# Altium PCB Sensor.PcbDoc
Units mm, origin at the board's own origin, x right, y up, seen from the top; angles counter-clockwise.
Board outline 55 x 55 mm, 2 copper layers (Top Layer, Bottom Layer); 53 components, 39 nets, 225 pads, 48 vias.
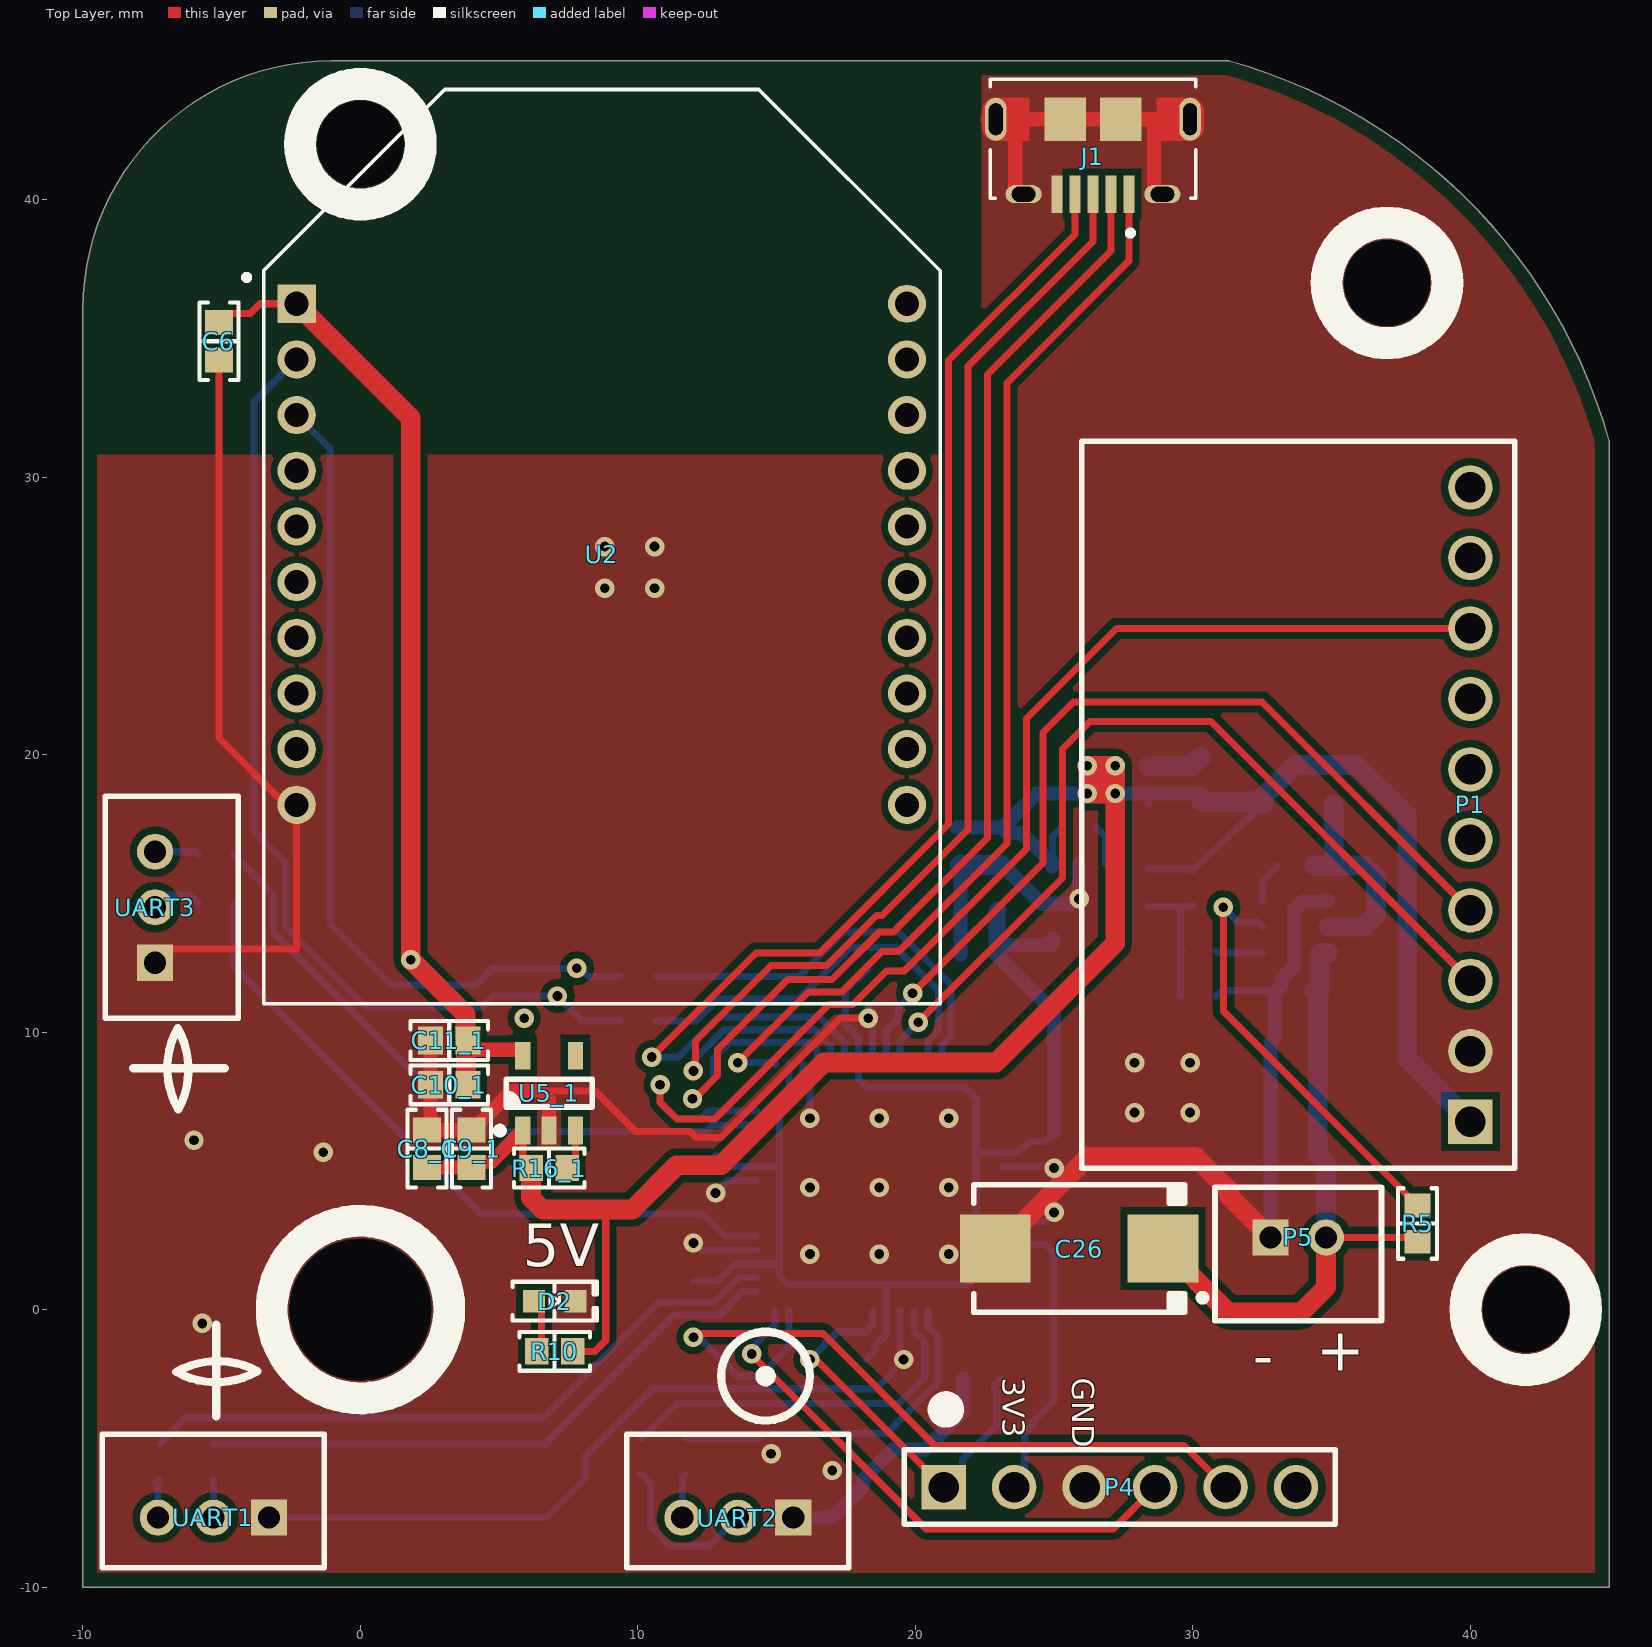
[diagram p0: Top Layer view]
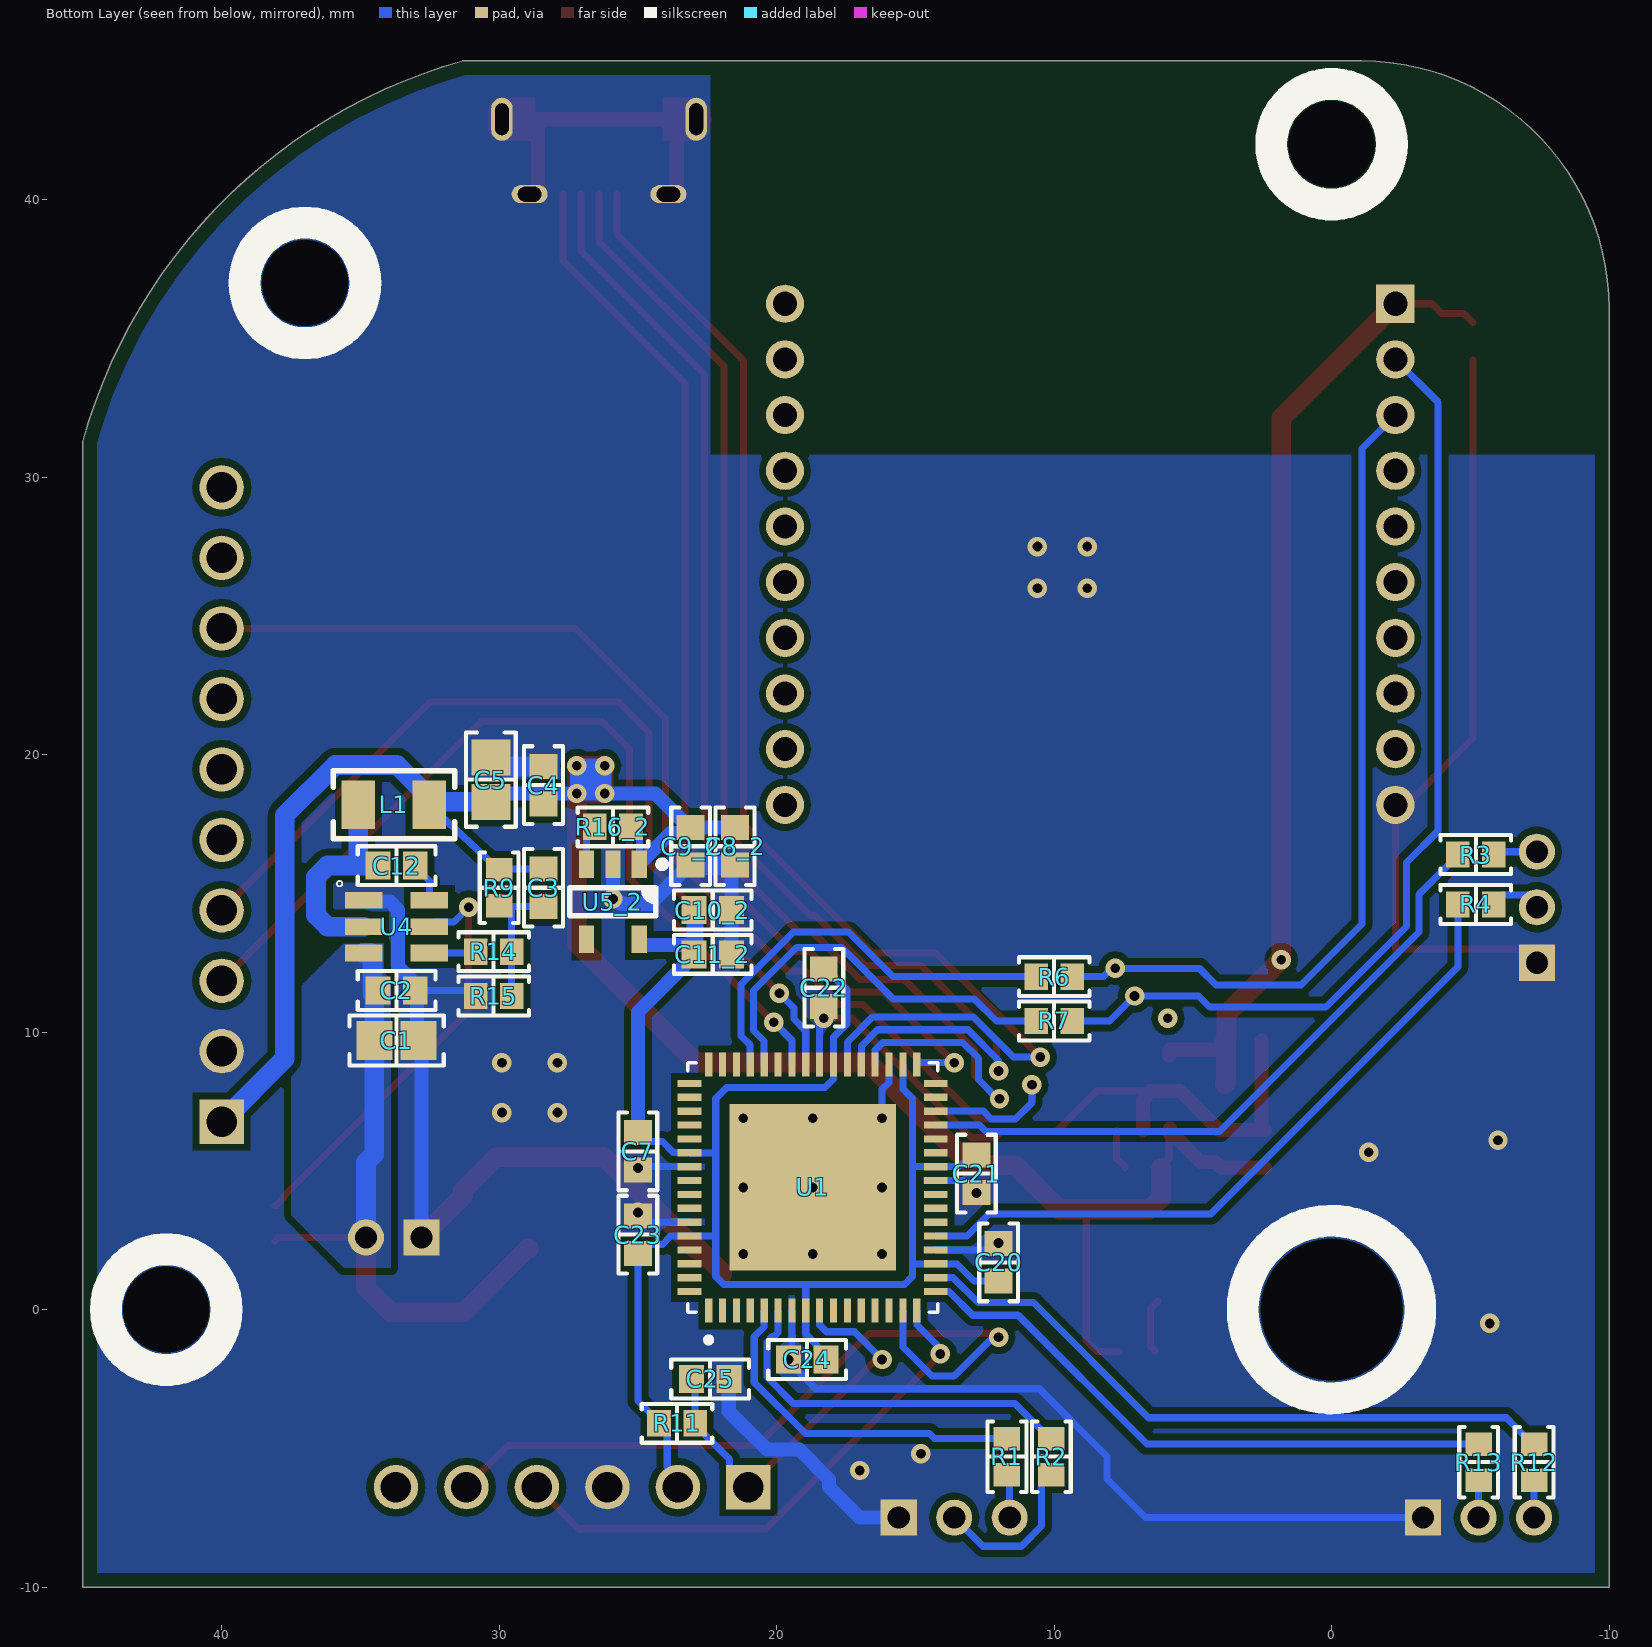
[diagram p1: Bottom Layer view, seen from below]
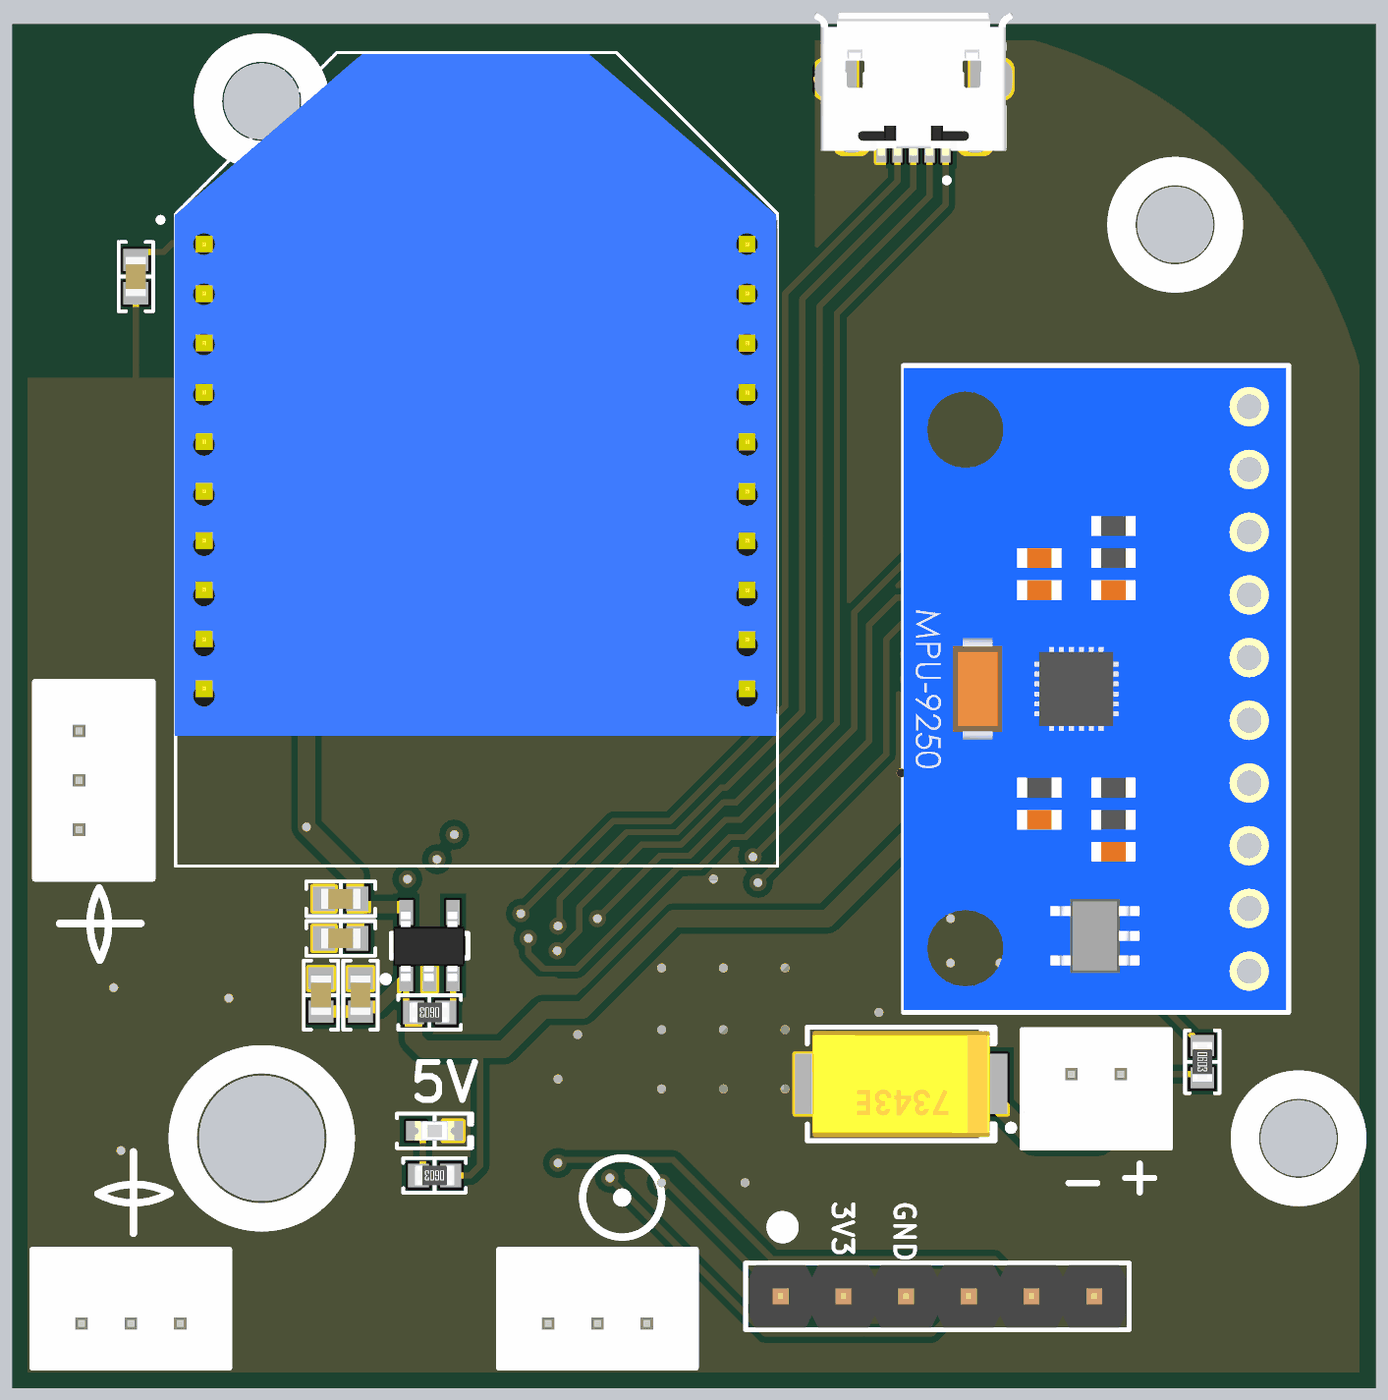
[diagram p2: 3D render of the assembled board from above, using the file's embedded part models]
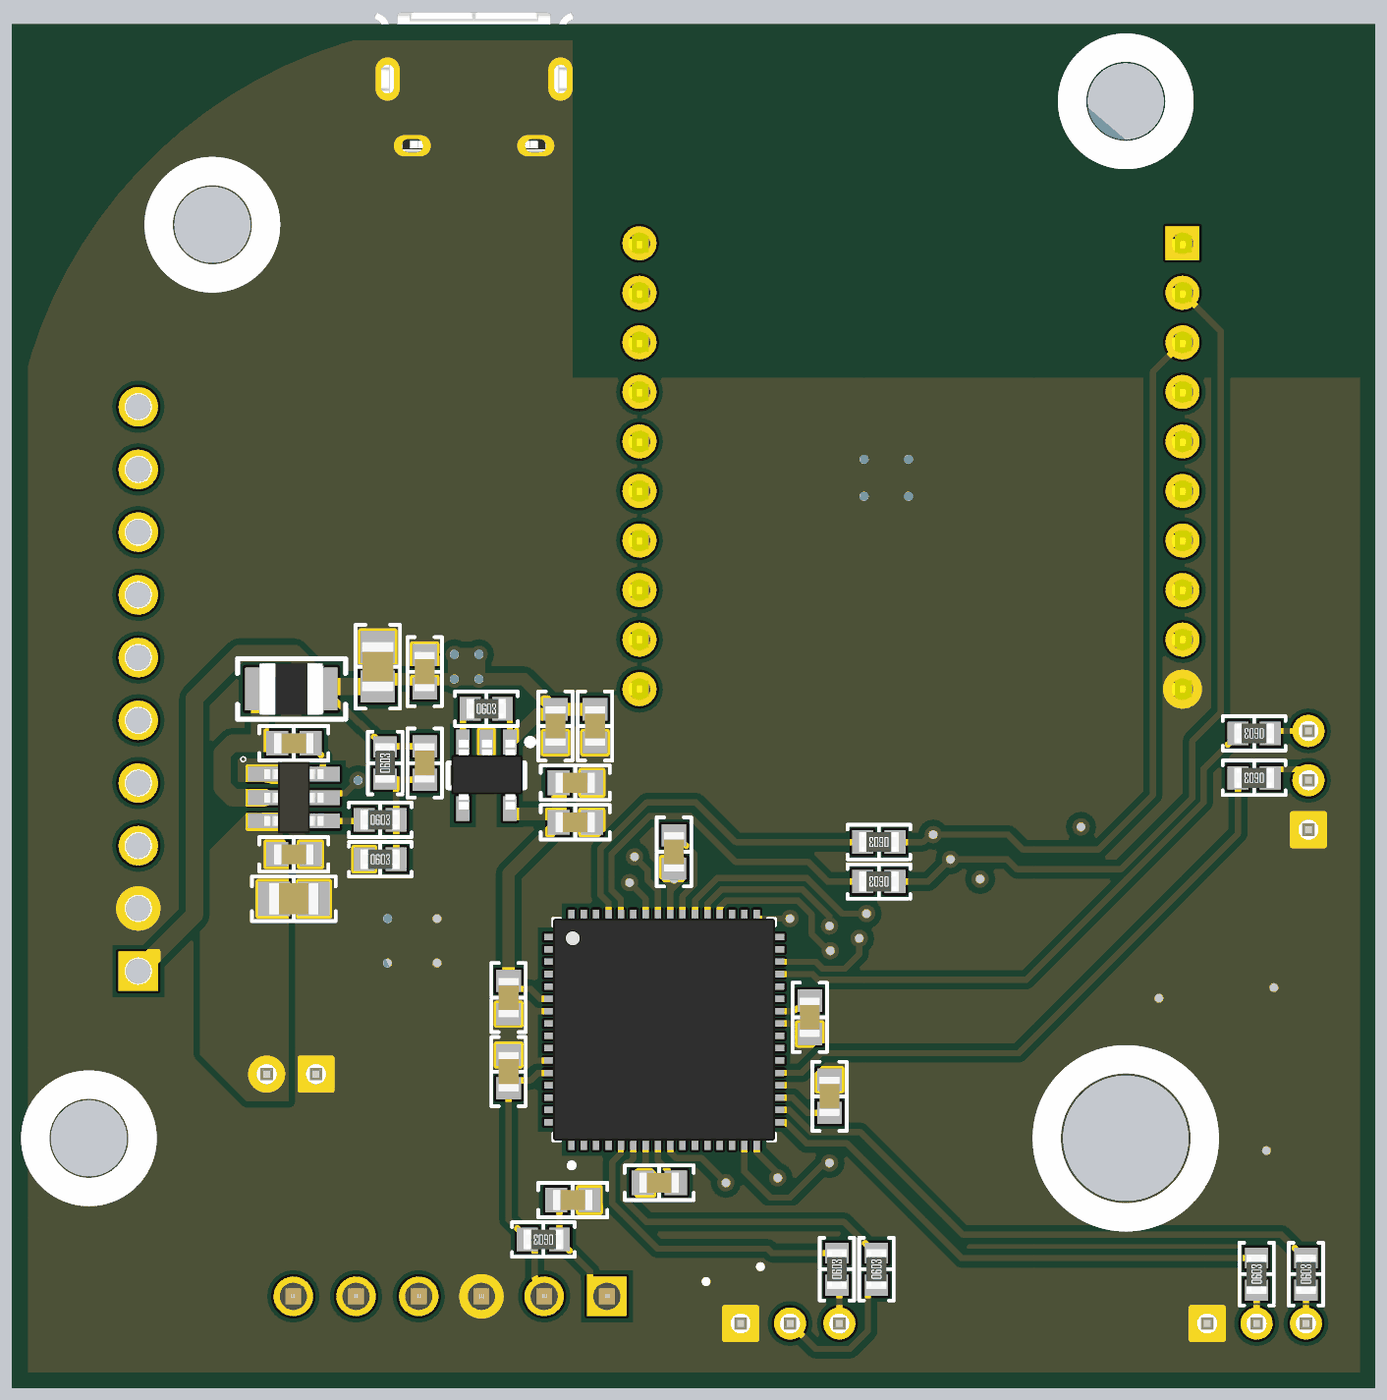
[diagram p3: 3D render of the assembled board from below, using the file's embedded part models]

## Layer stack, top to bottom
Top Solder: solder mask 0.0102, Solder Resist, Dk 3.5
Top Layer: signal copper 0.0356
Dielectric 1: dielectric 0.32, FR-4, Dk 4.8
Bottom Layer: signal copper 0.0356
Bottom Solder: solder mask 0.0102, Solder Resist, Dk 3.5

## Board outline
-10,-10 -10,36.067 cw(c-1.067,36.067) -1.067,45 31.311,45 cw(c26,26) 45,31.311 45,-10

## Design rules (kind name [scope] priority, off if disabled: settings)
BoardOutlineClearance [All] p1: gap=0.512 ignorepadtopadclearanceinfootprint=FALSE
Clearance "PolyGon Pour Clearance" [InPolygon] p1: gap=0.254 ignorepadtopadclearanceinfootprint=FALSE except(0: Arc-Hole Track-Hole SMDPad-Hole THPad-Hole Via-Hole Fill-Hole Poly-Hole Region-Hole Text-Hole; 0.512: Arc-Text Track-Text SMDPad-Text THPad-Text Via-Text Fill-Text Poly-Text Region-Text Text-Text)
Clearance [All] p2: gap=0.254 ignorepadtopadclearanceinfootprint=TRUE except(0: Arc-Hole Track-Hole SMDPad-Hole THPad-Hole Via-Hole Fill-Hole Poly-Hole Region-Hole Text-Hole; 0.2: Arc-Arc Arc-Track Arc-SMDPad Track-Track Track-SMDPad SMDPad-SMDPad)
PolygonConnect [All] p1: connectstyle=Direct reliefconductorwidth=0.254 reliefentries=4 polygonreliefangle="90 Angle" airgapwidth=0.254
RoutingVias [All] p1: holewidth=0.35 width=0.7 viastyle="Through Hole" minholewidth=0.35 minwidth=0.7 maxholewidth=0.711 maxwidth=1.27
SolderMaskExpansion [All] p1: expansion=0.102 istentingtop=FALSE
Width [All] p1: maxlimit=0.712 minlimit=0.254 preferedwidth=0.254
30 further rules are at their usual default settings.

## Classes and differential pairs
channel class 3V3_LDO: U_3V3_LDO2

## Components (designator, comment, footprint, x,y, rotation, side; value= is the part's Value field where it differs from the comment)
C1 "22µF" "CAP 0805_2012" 33.7,9.7 r0 bottom
C2 "0.1µF" "CAP 0603_1608" 33.7,11.5 r180 bottom
C3 "47pF" "CAP 0603_1608" 28.4,15.2 r90 bottom
C4 "1µF" "CAP 0603_1608" 28.4,18.9 r270 bottom
C5 "22µF" "CAP 0805_2012" 30.3,19.1 r270 bottom
C6 "1µF" "CAP 0603_1608" -5.1,34.9 r90 top
C7 "0.1µF" "CAP 0603_1608" 25,5.7 r270 bottom
C8_1 "1µF" "CAP 0603_1608" 2.4,5.8 r270 top (schematic designator C8)
C8_2 "1µF" "CAP 0603_1608" 21.5,16.7 r90 bottom (schematic designator C8)
C9_1 "0.1µF" "CAP 0603_1608" 4,5.8 r90 top (schematic designator C9)
C9_2 "0.1µF" "CAP 0603_1608" 23.1,16.7 r270 bottom (schematic designator C9)
C10_1 "0.1µF" "CAP 0603_1608" 3.2,8.1 r180 top (schematic designator C10)
C10_2 "0.1µF" "CAP 0603_1608" 22.3,14.4 r180 bottom (schematic designator C10)
C11_1 "1µF" "CAP 0603_1608" 3.2,9.7 r0 top (schematic designator C11)
C11_2 "1µF" "CAP 0603_1608" 22.3,12.8 r0 bottom (schematic designator C11)
C12 "1µF" "CAP 0603_1608" 33.7,16 r180 bottom
C20 "0.1µF" "CAP 0603_1608" 12,1.7 r90 bottom
C21 "0.1µF" "CAP 0603_1608" 12.8,4.9 r270 bottom
C22 "0.1µF" "CAP 0603_1608" 18.3,11.6 r270 bottom
C23 "0.1µF" "CAP 0603_1608" 25,2.7 r90 bottom
C24 "0.1µF" "CAP 0603_1608" 18.9,-1.8 r0 bottom
C25 "0.1µF" "CAP 0603_1608" 22.4,-2.5 r180 bottom
C26 "100µF" "CAP POL 2917_7343" 25.9,2.2 r180 top
D2 "Green" "LED 0603_1608 GREEN" 7,0.3 r0 top
J1 "Mirco USB port" AMPHENOL_10118194-0001LF 26.4,42.9 r180 top
L1 "4.7µH" "IND 1008_2520" 33.8,18.2 r180 bottom
P1 "MPU9250" "MPU 9150 - 10 pin 0.1\"" 40,18.2 r270 top
P4 "61300611121" 61300611121 27.37,-6.4 r0 top
P5 "2 pin 2mm JST Male" "2pin - 2mm JST male" 33.8,2.6 r0 top
R1 "21.5 Ohms" "RES 0603_1608" 11.7,-5.3 r90 bottom
R2 "21.5 Ohms" "RES 0603_1608" 10.1,-5.3 r90 bottom
R3 "21.5 Ohms" "RES 0603_1608" -5.2,16.4 r0 bottom
R4 "21.5 Ohms" "RES 0603_1608" -5.2,14.6 r0 bottom
R5 "10 kOhms" "RES 0603_1608" 38.1,3.1 r270 top
R6 "21.5 Ohms" "RES 0603_1608" 10,12 r0 bottom
R7 "21.5 Ohms" "RES 0603_1608" 10,10.4 r0 bottom
R9 "40.2 kOhms" "RES 0603_1608" 30,15.2 r90 bottom
R10 "1 kOhms" "RES 0603_1608" 7,-1.504 r180 top
R11 "10 kOhms" "RES 0603_1608" 23.59,-4.1 r0 bottom
R12 "21.5 Ohms" "RES 0603_1608" -7.3,-5.5 r90 bottom
R13 "21.5 Ohms" "RES 0603_1608" -5.3,-5.5 r90 bottom
R14 "75 kOhms" "RES 0603_1608" 30.2,12.9 r180 bottom
R15 "7.68 kOhms" "RES 0603_1608" 30.2,11.3 r180 bottom
R16_1 "10 kOhms" "RES 0603_1608" 6.8,5.1 r180 top (schematic designator R16)
R16_2 "10 kOhms" "RES 0603_1608" 25.9,17.4 r180 bottom (schematic designator R16)
U1 "PIC32MZ0512EFE064" QFN50P900X900X100-65N 18.7,4.4 r90 bottom
U2 "XBee" XBee 8.7,27.5 r0 top
U4 "AP65211A" TSOT-26-6 33.7,13.8 r180 bottom
U5_1 "MIC5504" "TI SOT-23-5 DBV" 6.8,7.8 r90 top (schematic designator U5)
U5_2 "MIC5504" "TI SOT-23-5 DBV" 25.9,14.7 r270 bottom (schematic designator U5)
UART1 "3 pin 2mm JST Male" "3pin - 2mm header" -5.3,-7.5 r180 top
UART2 "3 pin 2mm JST Male" "3pin - 2mm header" 13.6,-7.5 r180 top
UART3 "3 pin 2mm JST Male" "3pin - 2mm header" -7.4,14.5 r90 top

## Footprints (in the part's own frame and the unit in brackets; to place one, negate y for a bottom-side part, rotate by r counter-clockwise, add the part's x,y. Pads: shape width x height; smd on the part's side, far side on the other; paste and mask are expansions set on the pad)
"2pin - 2mm JST male" [mm]
  rect 1.3x1.3 hole 0.8: 1(-1,0)
  round 1.3 hole 0.8: 2(1,0)
  silkscreen extent -3,-3 3,1.8, body extent -2.93,-2.97 2.93,1.7, height 5.89
"3pin - 2mm header" [mm]
  rect 1.3x1.3 hole 0.8: 1(-2,0)
  round 1.3 hole 0.8: 2(0,0) 3(2,0)
  silkscreen extent -4,-3 4,1.8, body extent -3.93,-2.97 3.93,1.7, height 5.89
61300611121 [mm] "Pin Header, pitch 2.54 mm, THT, Vertical, single row, 6p"
  rect 1.6x1.6 hole 1.1: 1(-6.35,0)
  round 1.6 hole 1.1: 2(-3.81,0) 3(-1.27,0) 4(1.27,0) 5(3.81,0) 6(6.35,0)
  silkscreen extent -7.77,-1.35 7.77,1.35, body extent -7.62,-1.27 7.62,1.27, height 8.57
AMPHENOL_10118194-0001LF [mm]
  rect 0.4x1.35 smd: 1(-1.3,2.7) 2(-0.65,2.7) 3(0,2.7) 4(0.65,2.7) 5(1.3,2.7)
  oval 1.3x0.65 hole 0.55 slot 0.85 at 0 deg: S1(-2.5,2.7) S2(2.5,2.7)
  oval 0.775x1.55 hole 0.5 slot 1.15 at 90 deg: S3(-3.5,0) S6(3.5,0)
  rect 1.5x1.55 smd: S4(-1,0) S5(1,0)
  Top Layer region: 193 vertices and 0 holes, not listed, extent 2.3,-0.78 4,0.775
  Top Layer region: 193 vertices and 0 holes, not listed, extent -4,-0.775 -2.3,0.78
  silkscreen extent -3.7,-1.45 3.7,4.2, body extent -4.02,-2.7 4.03,3.1, height 2.7
"CAP 0603_1608" [mm] "Chip Capacitor, 2-Leads, Body 1.60x0.80mm, IPC Medium Density"
  rect 0.9x1 smd: 1(-0.675,0) 2(0.675,0)
  silkscreen extent -1.4,-0.7 1.4,0.7, body extent -0.8,-0.41 0.8,0.41, height 0.82
"CAP 0805_2012" [mm] "Chip Capacitor, 2-Leads, Body 2.00x1.20mm, IPC Medium Density"
  rect 1.3x1.4 smd: 1(-0.8,0) 2(0.8,0)
  silkscreen extent -1.7,-0.9 1.7,0.9, body extent -1,-0.64 1,0.64, height 1.26
"CAP POL 2917_7343" [mm] "Molded Capacitor, 2-Leads, Body 7.30x4.30mm, IPC Medium Density"
  rect 2.55x2.45 smd: 1(-3.025,0) 2(3.025,0)
  silkscreen extent -4.58,-2.3 3.8,2.3, body extent -3.65,-2.15 3.65,2.15, height 4.1
"IND 1008_2520" [mm] "Chip Inductance, 2-leads, Body 2.5x2.1mm, IPC Medium Density"
  rect 1.2x1.75 smd: 1(-1.275,0) 2(1.275,0)
  silkscreen extent -2.18,-1.22 2.2,1.22, body extent -1.3,-1.05 1.3,1.05, height 1
"LED 0603_1608 GREEN" [mm] "Chip Diode, 2-Leads, Body 1.60x0.80mm, IPC Medium Density"
  rect 0.8x0.8 smd: 1(-0.75,0) 2(0.75,0)
  silkscreen extent -1.52,-0.7 1.52,0.7, body extent -0.8,-0.4 0.8,0.4, height 0.53
"MPU 9150 - 10 pin 0.1\"" [mm] "Pin Header, pitch 2.54 mm, THT, Vertical, single row, 10p"
  rect 1.6x1.6 hole 1.1: 1(11.43,0)
  round 1.6 hole 1.1: 2(8.89,0) 3(6.35,0) 4(3.81,0) 5(1.27,0) 6(-1.27,0) 7(-3.81,0) 8(-6.35,0) 9(-8.89,0) 10(-11.43,0)
  silkscreen extent -13.1,-14 13.1,1.6, body extent -13,-14 13,1.5, height 3.4
QFN50P900X900X100-65N [mm]
  rect 0.86x0.26 smd: 1(-4.435,3.75) 2(-4.435,3.25) 3(-4.435,2.75) 4(-4.435,2.25) 5(-4.435,1.75) 6(-4.435,1.25) 7(-4.435,0.75) 8(-4.435,0.25) 9(-4.435,-0.25) 10(-4.435,-0.75) 11(-4.435,-1.25) 12(-4.435,-1.75) 13(-4.435,-2.25) 14(-4.435,-2.75) 15(-4.435,-3.25) 16(-4.435,-3.75) 33(4.435,-3.75) 34(4.435,-3.25) 35(4.435,-2.75) 36(4.435,-2.25) 37(4.435,-1.75) 38(4.435,-1.25) 39(4.435,-0.75) 40(4.435,-0.25) 41(4.435,0.25) 42(4.435,0.75) 43(4.435,1.25) 44(4.435,1.75) 45(4.435,2.25) 46(4.435,2.75) 47(4.435,3.25) 48(4.435,3.75)
  rect 0.26x0.86 smd: 17(-3.75,-4.435) 18(-3.25,-4.435) 19(-2.75,-4.435) 20(-2.25,-4.435) 21(-1.75,-4.435) 22(-1.25,-4.435) 23(-0.75,-4.435) 24(-0.25,-4.435) 25(0.25,-4.435) 26(0.75,-4.435) 27(1.25,-4.435) 28(1.75,-4.435) 29(2.25,-4.435) 30(2.75,-4.435) 31(3.25,-4.435) 32(3.75,-4.435) 49(3.75,4.435) 50(3.25,4.435) 51(2.75,4.435) 52(2.25,4.435) 53(1.75,4.435) 54(1.25,4.435) 55(0.75,4.435) 56(0.25,4.435) 57(-0.25,4.435) 58(-0.75,4.435) 59(-1.25,4.435) 60(-1.75,4.435) 61(-2.25,4.435) 62(-2.75,4.435) 63(-3.25,4.435) 64(-3.75,4.435)
  rect 6x6 smd: 65(0,0)
  silkscreen extent -5.59,-4.5 4.5,4.5, body extent -4.52,-4.52 4.52,4.52, height 0.9
"RES 0603_1608" [mm] "Chip Resistor, 2-Leads, Body 1.60x0.80mm, IPC Medium Density"
  rect 0.85x0.95 smd: 1(-0.65,0) 2(0.65,0)
  silkscreen extent -1.27,-0.7 1.27,0.7, body extent -0.8,-0.4 0.8,0.4, height 0.45
"TI SOT-23-5 DBV" [mm] "SOT23, 5-Leads, Body 2.90x2.80mm, Pitch 0.95mm, IPC Medium Density"
  rect 1x0.55 smd: 1(-1.35,0.95) 2(-1.35,0) 3(-1.35,-0.95) 4(1.35,-0.95) 5(1.35,0.95)
  silkscreen extent -1.47,-1.55 0.5,1.9, body extent -1.44,-1.43 1.39,1.48, height 1.5
TSOT-26-6 [mm]
  rect 1.35x0.6 smd: 1(-1.185,0.95) 2(-1.185,0) 3(-1.185,-0.95) 4(1.185,-0.95) 5(1.185,0) 6(1.185,0.95)
  silkscreen extent -2.15,1.45 -1.95,1.65, body extent -1.2,-1.45 1.2,1.45, height 1
XBee [mil]
  rect 54.25x54.25 hole 34.25: 1(-433,344.5)
  round 54.25 hole 34.25: 2(-433,265.5) 3(-433,186.5) 4(-433,107.5) 5(-433,28.5) 6(-433,-50.5) 7(-433,-129.5) 8(-433,-208.5) 9(-433,-287.5) 10(-433,-366.5) 11(433,-366.5) 12(433,-287.5) 13(433,-208.5) 14(433,-129.5) 15(433,-50.5) 16(433,28.5) 17(433,107.5) 18(433,186.5) 19(433,265.5) 20(433,344.5)
  silkscreen extent -508,-648 480,648, body extent -482,-441 480,646, height 370

## Part data
C1: library part C2012X7S1E106K125AC, "CAP CER 10UF 25V X7S 0805", Capacitance=10µF, Device Package="0805 (2012 Metric)", Manufacturer="TDK Corporation", Operating Temperature="-55°C ~ 125°C", Supplier Part Number 1=445-181600-1-ND, Temperature Coefficient=X7S, Tolerance=±10%, Voltage - Rated=25V, Applications="General Purpose", ComponentLink1Description=Datasheet, ComponentLink1URL=https://product.tdk.com/en/search/capacitor/ceramic/mlcc/info?part_no=C2012X7S1E106K125AC?ref_disty=digikey, ComponentLink2Description="DigiKey Link", ComponentLink2URL=http://digikey.com/product-detail/en/tdk-corporation/C2012X7S1E106K125AC/445-181600-1-ND/9991478, Features="Low ESL", LastUpdated="21-Jan-20 12:03:04 AM", Lifecycle Status=Active, Minimum Order=1, Mounting Type="Surface Mount, MLCC", Package / Case="0805 (2012 Metric)", Packaging=TapeAndReel, Part Number=C2012X7S1E106K125AC, Part Status=Active, PartId=3339, Price=0.15, Series=C, Size / Dimension="0.079\" L x 0.049\" W (2.00mm x 1.25mm)", Supplier 1=DigiKey, Thickness (Max)="0.057\" (1.45mm)"
C2 C7 C9_1 C9_2 C10_1 C10_2 C20 C21 C22 C23 C24 C25: library part GCG188R92A104KA03D, "CAP CER 0.1UF 100V 0603 EPOXY", Device Package="0603 (1608 Metric)", Manufacturer="Murata Electronics", Operating Temperature="-55°C ~ 150°C", Ratings=AEC-Q200, Supplier Part Number 1=490-18197-1-ND, Temperature Coefficient=X8R, Tolerance=±10%, Voltage - Rated=100V, Applications=Automotive, Capacitance=0.1µF, ComponentLink1Description=Datasheet, ComponentLink1URL=https://search.murata.co.jp/Ceramy/image/img/A01X/G101/ENG/GCG188R92A104KA03-01.pdf, ComponentLink2Description="DigiKey Link", ComponentLink2URL=http://digikey.com/product-detail/en/murata-electronics/GCG188R92A104KA03D/490-18197-1-ND/9867926, Features="Epoxy Mountable", LastUpdated="21-Jan-20 12:01:59 AM", Lifecycle Status=Active, Minimum Order=1, Mounting Type="Surface Mount, MLCC, Epoxy", Package / Case="0603 (1608 Metric)", Packaging=TapeAndReel, Part Number=GCG188R92A104KA03D, Part Status=Active, PartId=9025, Price=0.07, Series=GCG, Size / Dimension="0.063\" L x 0.031\" W (1.60mm x 0.80mm)", Supplier 1=DigiKey, Thickness (Max)="0.035\" (0.90mm)"
C3: library part C1608NP02A470J080AA, "CAP CER 47PF 100V NP0 0603", Device Package="0603 (1608 Metric)", Manufacturer="TDK Corporation", Operating Temperature="-55°C ~ 150°C", Supplier Part Number 1=445-14125-1-ND, Temperature Coefficient="C0G, NP0", Tolerance=±5%, Applications="General Purpose", Capacitance=47pF, ComponentLink1Description=Datasheet, ComponentLink1URL=https://product.tdk.com/info/en/catalog/datasheets/mlcc_commercial_hightemp_en.pdf?ref_disty=digikey, ComponentLink2Description="DigiKey Link", ComponentLink2URL=http://digikey.com/product-detail/en/tdk-corporation/C1608NP02A470J080AA/445-14125-1-ND/3955791, Features="High Temperature", LastUpdated="13-Aug-20 10:25:18 AM", Lifecycle Status=Active, Minimum Order=1, Mounting Type="Surface Mount, MLCC", Package / Case="0603 (1608 Metric)", Packaging=TapeAndReel, Part Number=C1608NP02A470J080AA, Part Status=Active, PartId=7049, Price=0.04, Series=C, Size / Dimension="0.063\" L x 0.031\" W (1.60mm x 0.80mm)", Supplier 1=DigiKey, Thickness (Max)="0.035\" (0.90mm)"
C4 C8_1 C8_2 C11_1 C11_2 C12: library part GCJ188R71E105KA01D, "CAP CER 1UF 25V X7R 0603", Device Package="0603 (1608 Metric)", Manufacturer="Murata Electronics", Operating Temperature="-55°C ~ 125°C", Ratings=AEC-Q200, Supplier Part Number 1=490-14409-1-ND, Temperature Coefficient=X7R, Tolerance=±10%, Applications="Automotive, Boardflex Sensitive", Capacitance=1µF, ComponentLink1Description=Datasheet, ComponentLink1URL=https://search.murata.co.jp/Ceramy/image/img/A01X/G101/ENG/GCJ188R71E105KA01-01.pdf, ComponentLink2Description="DigiKey Link", ComponentLink2URL=http://digikey.com/product-detail/en/murata-electronics/GCJ188R71E105KA01D/490-14409-1-ND/6606870, Features="Soft Termination", LastUpdated="13-Aug-20 10:24:06 AM", Lifecycle Status=Active, Minimum Order=1, Mounting Type="Surface Mount, MLCC", Package / Case="0603 (1608 Metric)", Packaging=TapeAndReel, Part Number=GCJ188R71E105KA01D, Part Status=Active, PartId=9566, Price=0.05, Series=GCJ, Size / Dimension="0.063\" L x 0.031\" W (1.60mm x 0.80mm)", Supplier 1=DigiKey, Thickness (Max)="0.035\" (0.90mm)"
C5: library part CL21A226MOQNNNE, "CAP CER 22UF 16V X5R 0805", Device Package="0805 (2012 Metric)", Manufacturer="Samsung Electro-Mechanics", Operating Temperature="-55°C ~ 85°C", Supplier Part Number 1=1276-2909-1-ND, Temperature Coefficient=X5R, Tolerance=±20%, Voltage - Rated=16V, Applications="General Purpose", Capacitance=22µF, ComponentLink1Description=Datasheet, ComponentLink1URL=http://www.samsungsem.com/kr/support/product-search/mlcc/CL21A226MOQNNNE.jsp, ComponentLink2Description="DigiKey Link", ComponentLink2URL=http://digikey.com/product-detail/en/samsung-electro-mechanics/CL21A226MOQNNNE/1276-2909-1-ND/3890995, LastUpdated="21-Jan-20 12:03:05 AM", Lifecycle Status=Active, Minimum Order=1, Mounting Type="Surface Mount, MLCC", Package / Case="0805 (2012 Metric)", Packaging=TapeAndReel, Part Number=CL21A226MOQNNNE, Part Status=Active, PartId=3052, Price=0.11, Series=CL, Size / Dimension="0.079\" L x 0.049\" W (2.00mm x 1.25mm)", Supplier 1=DigiKey, Thickness (Max)="0.055\" (1.40mm)"
C6: library part GCJ188R71E105KA01D, "CAP CER 1UF 25V X7R 0603", Device Package="0603 (1608 Metric)", Manufacturer="Murata Electronics", Operating Temperature="-55°C ~ 125°C", Ratings=AEC-Q200, Supplier Part Number 1=490-14409-1-ND, Temperature Coefficient=X7R, Tolerance=±10%, Voltage - Rated=25V, Applications="Automotive, Boardflex Sensitive", Capacitance=1µF, ComponentLink1Description=Datasheet, ComponentLink1URL=https://search.murata.co.jp/Ceramy/image/img/A01X/G101/ENG/GCJ188R71E105KA01-01.pdf, ComponentLink2Description="DigiKey Link", ComponentLink2URL=http://digikey.com/product-detail/en/murata-electronics/GCJ188R71E105KA01D/490-14409-1-ND/6606870, Features="Soft Termination", LastUpdated="21-Jan-20 12:01:58 AM", Lifecycle Status=Active, Minimum Order=1, Mounting Type="Surface Mount, MLCC", Package / Case="0603 (1608 Metric)", Packaging=TapeAndReel, Part Number=GCJ188R71E105KA01D, Part Status=Active, PartId=9566, Price=0.05, Series=GCJ, Size / Dimension="0.063\" L x 0.031\" W (1.60mm x 0.80mm)", Supplier 1=DigiKey, Thickness (Max)="0.035\" (0.90mm)"
C26: library part 293D107X0020E2TE3, "CAP TANT 100UF 20% 20V 2917", Device Package="2917 (7343 Metric)", ESR (Equivalent Series Resistance)=500mOhm, Manufacturer="Vishay Sprague", Manufacturer Size Code=E, Operating Temperature="-55°C ~ 125°C", Supplier Part Number 1=718-293D107X0020E2TE3CT-ND, Tolerance=±20%, Capacitance=100µF, ComponentLink1Description=Datasheet, ComponentLink1URL=http://www.vishay.com/docs/40002/293d.pdf, ComponentLink2Description="DigiKey Link", ComponentLink2URL=http://digikey.com/product-detail/en/vishay-sprague/293D107X0020E2TE3/718-293D107X0020E2TE3CT-ND/10507022, Features="General Purpose", Height - Seated (Max)="0.170\" (4.32mm)", LastUpdated="13-Aug-20 10:43:35 AM", Lifecycle Status=Active, Minimum Order=1, Mounting Type="Surface Mount", Package / Case="2917 (7343 Metric)", Packaging=TapeAndReel, Part Number=293D107X0020E2TE3, Part Status=Active, PartId=1360, Price=0.70, Series="TANTAMOUNT®, 293D", Size / Dimension="0.287\" L x 0.169\" W (7.30mm x 4.30mm)", Supplier 1=DigiKey, Type=Molded
D2: library part XZCDGK53W-8VF, "1.6X0.8MM LC GREEN PIXSOLED DOME", Current - Test=2mA, Device Package="0603 (1608 Metric)", Lens Color=Colorless, Manufacturer=SunLED, Millicandela Rating=417mcd, Supplier Device Package=2-SMD, Supplier Part Number 1=1497-XZCDGK53W-8VFCT-ND, Voltage - Forward (Vf) (Typ)=2.65V, Color=Green, ComponentLink1Description=Datasheet, ComponentLink1URL=https://www.sunledusa.com/products/spec/XZCDGK53W-8VF.pdf, ComponentLink2Description="DigiKey Link", ComponentLink2URL=http://digikey.com/product-detail/en/sunled/XZCDGK53W-8VF/1497-XZCDGK53W-8VFCT-ND/10449792, Configuration=Independent, Height (Max)=1.10mm, LastUpdated="21-Jan-20 3:12:09 AM", Lens Size="0.35mm Dia", Lens Style="Round with Domed Top", Lens Transparency=Clear, Lifecycle Status=Active, Minimum Order=1, Mounting Type="Surface Mount", Package / Case="0603 (1608 Metric)", Packaging=Unknown, Part Number=XZCDGK53W-8VF, Part Status=Active, PartId=938, Price=0.18, Series="Ultra Low Current", Size / Dimension="1.60mm L x 0.80mm W", Supplier 1=DigiKey, Viewing Angle=60°, Wavelength - Dominant=525nm, Wavelength - Peak=515nm
J1: library part 10118194-0001LF, "USB - micro B USB 2.0 Receptacle Connector 5 Position Surface Mount, Right Angle; Through Hole", Package=None, Availability=Unavailable, MF="Amphenol ICC", MP=10118194-0001LF, Price=None, SnapEDA_Link=https://www.snapeda.com/parts/10118194-0001LF/Amphenol%20FCI/view-part/1413308/?ref=snap
L1: library part MLP2520S4R7ST0S1, "FIXED IND 4.7UH 1A 110 MOHM SMD", Current Rating (Amps)=1A, DC Resistance (DCR)="143mOhm Max", Device Package="1008 (2520 Metric)", Inductance Frequency - Test=2MHz, Manufacturer="TDK Corporation", Operating Temperature="-40°C ~ 125°C", Supplier Part Number 1=445-6378-1-ND, Tolerance=±20%, ComponentLink1Description=Datasheet, ComponentLink1URL=https://product.tdk.com/info/en/catalog/datasheets/inductor_commercial_power_mlp2520_en.pdf?ref_disty=digikey, ComponentLink2Description="DigiKey Link", ComponentLink2URL=http://digikey.com/product-detail/en/tdk-corporation/MLP2520S4R7ST0S1/445-6378-1-ND/2465705, Height - Seated (Max)="0.039\" (1.00mm)", Inductance=4.7µH, LastUpdated="13-Aug-20 11:03:40 AM", Lifecycle Status=Active, Material - Core=Ferrite, Minimum Order=1, Mounting Type="Surface Mount", Package / Case="1008 (2520 Metric)", Packaging=TapeAndReel, Part Number=MLP2520S4R7ST0S1, Part Status=Active, PartId=3467, Price=0.14, Series=MLP, Shielding=Shielded, Size / Dimension="0.098\" L x 0.079\" W (2.50mm x 2.00mm)", Supplier 1=DigiKey, Supplier Device Package="1008 (2520 Metric)", Type=Multilayer
P1: library part "9 DOF - MPU025 - Breakout", "9 DOF - MPU025- Breakout", Contact Resistance=20mOhm, Manufacturer="Wurth Elektronik", Manufacturer Part Number=61301011121, Operating Temperature="-40 to +105degC", Rated Current=3A, Withstanding Voltage=500VAC, Working Voltage=250VAC, ComponentLink1Description=Manufacturer, ComponentLink1URL=http://www.we-online.de, ComponentLink2Description=Datasheet, ComponentLink2URL=https://www.we-online.com/catalog/datasheet/61301011121.pdf, Gender="Pin Header", Mounting Technology=THT, Orientation=Vertical, Packaging=Bag, Pin Number=10, Pitch=2.54mm, Published Date="May 2020", Row Number=Single
P4: "WR-PHD Pin Header, THT, pitch 2.54mm, Single Row, Vertical, 6p", Contact Resistance=20mOhm, Manufacturer="Wurth Elektronik", Operating Temperature="-40 to +105degC", Rated Current=3A, Withstanding Voltage=500VAC, Working Voltage=250VAC, ComponentLink1Description=Manufacturer, ComponentLink1URL=http://www.we-online.de, ComponentLink2Description=Datasheet, ComponentLink2URL=https://www.we-online.com/catalog/datasheet/61300611121.pdf, Gender="Pin Header", Manufacturer Part Number=61300611121, Mounting Technology=THT, Orientation=Vertical, Packaging=Bag, Pin Number=6, Pitch=2.54mm, Published Date="May 2020", Row Number=Single
R1 R2 R3 R4 R6 R7 R12 R13: library part ERJ-3EKF21R5V, "RES SMD 21.5 OHM 1% 1/10W 0603", Device Package="0603 (1608 Metric)", Manufacturer="Panasonic Electronic Components", Operating Temperature="-55°C ~ 155°C", Power (Watts)="0.1W, 1/10W", Ratings=AEC-Q200, Supplier Device Package=0603, Supplier Part Number 1=P21.5HCT-ND, Temperature Coefficient=±100ppm/°C, Tolerance=±1%, ComponentLink1Description=Datasheet, ComponentLink1URL=https://industrial.panasonic.com/cdbs/www-data/pdf/RDA0000/AOA0000C304.pdf, ComponentLink2Description="DigiKey Link", ComponentLink2URL=http://digikey.com/product-detail/en/panasonic-electronic-components/ERJ-3EKF21R5V/P21.5HCT-ND/198246, Composition="Thick Film", Features="Automotive AEC-Q200", Height - Seated (Max)="0.022\" (0.55mm)", LastUpdated="21-Jan-20 12:16:19 AM", Lifecycle Status=Active, Minimum Order=1, Number of Terminations=2, Package / Case="0603 (1608 Metric)", Packaging=TapeAndReel, Part Number=ERJ-3EKF21R5V, Part Status=Active, PartId=24202, Price=0.01, Resistance="21.5 Ohms", Series=ERJ, Size / Dimension="0.063\" L x 0.031\" W (1.60mm x 0.80mm)", Supplier 1=DigiKey
R5 R11 R16_1 R16_2: library part RNCS0603BKE10K0, "RES 10K OHM 0.1% 1/16W 0603", Device Package="0603 (1608 Metric)", Manufacturer="Stackpole Electronics Inc", Operating Temperature="-55°C ~ 155°C", Power (Watts)="0.063W, 1/16W", Ratings=AEC-Q200, Supplier Device Package=0603, Supplier Part Number 1=RNCS0603BKE10K0CT-ND, Temperature Coefficient=±25ppm/°C, Tolerance=±0.1%, ComponentLink1Description=Datasheet, ComponentLink1URL=https://www.seielect.com/catalog/sei-rncs_rnch.pdf, ComponentLink2Description="DigiKey Link", ComponentLink2URL=http://digikey.com/product-detail/en/stackpole-electronics-inc/RNCS0603BKE10K0/RNCS0603BKE10K0CT-ND/1800113, Composition="Thin Film", Features="Anti-Corrosive, Automotive AEC-Q200, Moisture Resistant", Height - Seated (Max)="0.022\" (0.55mm)", Lifecycle Status=Active, Minimum Order=1, Number of Terminations=2, Package / Case="0603 (1608 Metric)", Packaging=TapeAndReel, Part Number=RNCS0603BKE10K0, Part Status=Active, PartId=4838, Price=0.08, Resistance="10 kOhms", Series=RNCS, Size / Dimension="0.061\" L x 0.031\" W (1.55mm x 0.80mm)", Supplier 1=DigiKey
  R5 R16_1 R16_2: LastUpdated="21-Jan-20 12:25:01 AM"
  R11: LastUpdated="13-Aug-20 10:37:13 AM"
R9: library part RT0603DRD0740K2L, "RES SMD 40.2KOHM 0.5% 1/10W 0603", Device Package="0603 (1608 Metric)", Manufacturer=Yageo, Operating Temperature="-55°C ~ 155°C", Power (Watts)="0.1W, 1/10W", Supplier Device Package=0603, Supplier Part Number 1=311-40.2KDCT-ND, Temperature Coefficient=±25ppm/°C, Tolerance=±0.5%, ComponentLink1Description=Datasheet, ComponentLink1URL=https://www.yageo.com/upload/media/product/productsearch/datasheet/rchip/PYu-RT_1-to-0.01_RoHS_L_11.pdf, ComponentLink2Description="DigiKey Link", ComponentLink2URL=http://digikey.com/product-detail/en/yageo/RT0603DRD0740K2L/311-40.2KDCT-ND/1035817, Composition="Thin Film", Height - Seated (Max)="0.022\" (0.55mm)", LastUpdated="13-Aug-20 10:36:48 AM", Lifecycle Status=Active, Minimum Order=1, Number of Terminations=2, Package / Case="0603 (1608 Metric)", Packaging=TapeAndReel, Part Number=RT0603DRD0740K2L, Part Status=Active, PartId=18076, Price=0.02, Resistance="40.2 kOhms", Series=RT, Size / Dimension="0.063\" L x 0.031\" W (1.60mm x 0.80mm)", Supplier 1=DigiKey
R10: library part RNCF0603DTE1K00, "RES 1K OHM 0.5% 1/10W 0603", Device Package="0603 (1608 Metric)", Manufacturer="Stackpole Electronics Inc", Operating Temperature="-55°C ~ 155°C", Power (Watts)="0.1W, 1/10W", Ratings=AEC-Q200, Supplier Device Package=0603, Supplier Part Number 1=RNCF0603DTE1K00CT-ND, Temperature Coefficient=±25ppm/°C, Tolerance=±0.5%, ComponentLink1Description=Datasheet, ComponentLink1URL=https://www.seielect.com/catalog/sei-rncf.pdf, ComponentLink2Description="DigiKey Link", ComponentLink2URL=http://digikey.com/product-detail/en/stackpole-electronics-inc/RNCF0603DTE1K00/RNCF0603DTE1K00CT-ND/9915086, Composition="Thin Film", Features="Automotive AEC-Q200", Height - Seated (Max)="0.022\" (0.55mm)", LastUpdated="21-Jan-20 12:14:28 AM", Lifecycle Status=Active, Minimum Order=1, Number of Terminations=2, Package / Case="0603 (1608 Metric)", Packaging=TapeAndReel, Part Number=RNCF0603DTE1K00, Part Status=Active, PartId=26300, Price=0.05, Resistance="1 kOhms", Series=RNCF, Size / Dimension="0.061\" L x 0.031\" W (1.55mm x 0.80mm)", Supplier 1=DigiKey
R14: library part CR0603-JW-753ELF, "RES SMD 75K OHM 5% 1/10W 0603", Device Package="0603 (1608 Metric)", Manufacturer="Bourns Inc.", Operating Temperature="-55°C ~ 155°C", Power (Watts)="0.1W, 1/10W", Supplier Device Package=0603, Supplier Part Number 1=CR0603-JW-753ELFCT-ND, Temperature Coefficient=±200ppm/°C, Tolerance=±5%, ComponentLink1Description=Datasheet, ComponentLink1URL=https://www.bourns.com/docs/Product-Datasheets/CHPREZTR.pdf, ComponentLink2Description="DigiKey Link", ComponentLink2URL=http://digikey.com/product-detail/en/bourns-inc/CR0603-JW-753ELF/CR0603-JW-753ELFCT-ND/4247893, Composition="Thick Film", Features="Moisture Resistant", Height - Seated (Max)="0.022\" (0.55mm)", LastUpdated="13-Aug-20 10:36:37 AM", Lifecycle Status=Active, Minimum Order=1, Number of Terminations=2, Package / Case="0603 (1608 Metric)", Packaging=CutTape, Part Number=CR0603-JW-753ELF, Part Status=Active, PartId=23428, Price=0.10, Resistance="75 kOhms", Series=CR0603, Size / Dimension="0.063\" L x 0.031\" W (1.60mm x 0.80mm)", Supplier 1=DigiKey
R15: library part RMCF0603FT7K68, "RES 7.68K OHM 1% 1/10W 0603", Device Package="0603 (1608 Metric)", Manufacturer="Stackpole Electronics Inc", Operating Temperature="-55°C ~ 155°C", Power (Watts)="0.1W, 1/10W", Ratings=AEC-Q200, Supplier Device Package=0603, Supplier Part Number 1=RMCF0603FT7K68CT-ND, Temperature Coefficient=±100ppm/°C, Tolerance=±1%, ComponentLink1Description=Datasheet, ComponentLink1URL=https://www.seielect.com/catalog/sei-rmcf_rmcp.pdf, ComponentLink2Description="DigiKey Link", ComponentLink2URL=http://digikey.com/product-detail/en/stackpole-electronics-inc/RMCF0603FT7K68/RMCF0603FT7K68CT-ND/4425120, Composition="Thick Film", Features="Automotive AEC-Q200", Height - Seated (Max)="0.022\" (0.55mm)", LastUpdated="13-Aug-20 10:36:44 AM", Lifecycle Status=Active, Minimum Order=1, Number of Terminations=2, Package / Case="0603 (1608 Metric)", Packaging=CutTape, Part Number=RMCF0603FT7K68, Part Status=Active, PartId=20370, Price=0.10, Resistance="7.68 kOhms", Series=RMCF, Size / Dimension="0.061\" L x 0.031\" W (1.55mm x 0.80mm)", Supplier 1=DigiKey
U1: library part PIC32MZ0512EFE064-I/PT, "32-bit Microcontrollers - MCU 32-BIT MCU 512KB FL 128KB RAM, No Crypto", Package="TQFP-64 Microchip", Availability=Unavailable, MF=Microchip, MP=PIC32MZ2048EFG064T-I/PT, Price=None, SnapEDA_Link=https://www.snapeda.com/parts/PIC32MZ2048EFG064T-I/PT/Microchip/view-part/565997/?ref=snap
U2: "802.15.4 Transceiver Module 2.4GHz Antenna Not Included, U.FL Through Hole"
U4: "ADJ step down Buck"
U5_1 U5_2: library part MIC5504-3.3YM5, "3.3V LDO"

## Free pads (board coordinates)
  round 0 hole 5.1 unplated: 1(0,0)
  round 0 hole 3.1 unplated: 1(0,42) 1(37,37) 1(42,0)

## Via types
v1: diameter 0.7, hole 0.35, Top Layer to Bottom Layer, tented both sides, 48 vias

## Nets (pads, with @x,y where several pads share a name; then routed paths per layer and width w, separated by ;. In a path a pad name is that pad's centre, name@x,y a point inside that pad or via, vN(x,y) a via of type N, cw(c..) or ccw(c..) an arc to the next point about the centre after c; other vN are vias at no path point)
3V3: C7.1 C10_2.1 C11_2.2 C20.1 C21.1 C22.1 C23.1 C24.1 P4.2 R11.2 U1.8 U1.19 U1.26 U1.34 U1.39 U1.54 U1.60 U5_2.5 | length 65.8
  Bottom Layer w0.254: C20.1 12.881,1.025 13.503,1.647 14.262,1.647 U1.19 15.05,1.65 15.1,1.7 ; C21.1 13.123,5.252 13.355,5.252 13.454,5.153 14.262,5.153 U1.26 14.268,5.153 15.053,5.153 15.1,5.2 ; U1.34 15.447,8.832 15.45,8.829 15.45,7.95 15.1,7.6 15.1,5.2 ; C24.1 18.548,-1.477 18.548,-1.294 18.95,-0.892 U1.8 18.95,0.855 19,0.905 ; C22.1 17.977,11.952 17.915,11.952 17.473,11.51 17.473,10.293 17.95,9.816 U1.39 17.953,8.832 17.953,8.31 18.263,8 21.8,8 22.195,7.605 22.195,5.7 ; C11_2.2@22.975,12.75 C11_2.2 ; P4.2 23.56,-6.036 23.942,-5.654 23.942,-4.448 24.24,-4.15 R11.2@24.24,-4.05 ; R11.2 R11.2@24.24,-4.05 ; C7.1 24.677,6.052 24.119,6.052 23.72,5.653 23.138,5.653 U1.54 22.245,5.65 22.195,5.7 ; 15.1,1.7 15.1,1.2 15.395,0.905 19,0.905 ; 15.1,1.7 15.1,5.2 ; 19,0.905 21.905,0.905 22.195,1.195 22.195,2.7 ; 22.195,2.7 22.195,5.7 ; 22.195,2.7 22.245,2.65 U1.60 23.138,2.647 23.82,2.647 24.119,2.348 24.677,2.348 C23.1 25,-3.29 R11.2@24.24,-4.05
  Bottom Layer w0.508: C11_2.2@22.975,12.75 25,10.725 C7.1 ; C11_2.2@23.01,13.136 24.929,13.136 24.95,13.157 U5_2.5
  Bottom Layer w0.608: C11_2.2 22.947,12.828 22.947,13.136 22.947,14.372 C10_2.1
3V3_XBee: C6.2 C10_1.1 C11_1.2 U2.1 U5_1.5 | length 36
  Top Layer w0.254: C6.2 -4.777,35.898 -3.97,35.898 -3.617,36.25 U2.1
  Top Layer w0.508: C11_1.2@3.91,9.365 5.829,9.365 5.85,9.344 U5_1.5
  Top Layer w0.608: C10_1.1@3.847,8.128 C10_1.1
  Top Layer w0.712: U2.1 1.813,32.14 v1(1.813,12.612) 1.959,12.466 3.782,10.643 3.782,9.793 C11_1.2 ; C11_1.2@3.8,9.719 3.8,9.365 3.8,8.175 C10_1.1@3.847,8.128
5V: C3.2 C4.2 C5.2 C8_1.2 C8_2.2 C9_1.1 C9_2.1 L1.2 P1.1 R9.2 R10.1 R16_1.2 R16_2.2 U5_1.1 U5_2.1 | length 92.2
  Top Layer w0.254: U5_1.1 5.85,5.45 6.15,5.15 R16_1.2 ; R10.1 8.456,-1.504 8.841,-1.119 8.841,3.388 8.625,3.604
  Top Layer w0.508: C8_1.2 C9_1.1 4.196,5.321 4.719,5.321 5.735,6.337 5.829,6.337 U5_1.1@5.829,6.525
  Top Layer w0.712: R16_1.2 6.15,4.021 6.567,3.604 8.625,3.604 9.804,3.604 11.4,5.2 13,5.2 16.7,8.9 22.9,8.9 27.2,13.2 v1(27.2,18.6) ; v1(26.2,18.6) v1@26.232,18.6 ; v1@26.232,18.6 26.716,18.6 ; v1@26.232,18.6 26.232,19.6 26.716,19.6 ; 26.716,18.6 v1(27.2,18.6) ; 26.716,18.6 26.716,19.6 ; 26.716,19.6 v1(27.2,19.6) v1(27.2,18.6)
  Bottom Layer w0.254: C9_2.1 C9_2.1@23.15,17.375 ; U5_2.1 24.95,17.05 25.25,17.35 R16_2.2 ; C3.2 30,15.875 R9.2 32.361,18.047 L1.2 L1.2@32.125,18.6 ; C4.2 C4.2@28.4,18.6
  Bottom Layer w0.508: C8_2.2 C9_2.1 23.296,17.179 23.819,17.179 24.835,16.163 24.929,16.163 U5_2.1@24.929,15.975 ; C9_2.1@23.15,17.375 24.375,18.6 v1(26.2,18.6) ; C5.2@30.3,18.6 28.4,18.6 v1(27.2,18.6) ; v1(26.2,18.6) 26.7,18.6 ; v1(26.2,18.6) v1(26.2,19.6) 26.7,19.6 ; 26.7,18.6 26.7,19.6 ; 26.7,18.6 v1(27.2,18.6) ; 26.7,19.6 v1(27.2,19.6) v1(27.2,18.6)
  Bottom Layer w0.712: C5.2 L1.2@32.125,18.3 ; L1.2@32.525,18.225 32.525,18.475 33.681,19.631 35.905,19.631 37.731,17.806 37.731,9.039 P1.1
GND: C1.1 C2.2 C4.1 C5.1 C6.1 C7.2 C8_1.1 C8_2.1 C9_1.2 C9_2.2 C10_1.2 C10_2.2 C11_1.1 C11_2.1 C20.2 C21.2 C22.2 C23.2 C24.2 C25.2 C26.2 D2.2 J1.5 J1.S1 J1.S2 J1.S3 J1.S4 J1.S5 J1.S6 P1.2 P4.3 P5.1 R15.1 U1.7 U1.20 U1.25 U1.35 U1.40 U1.55 U1.59 U2.10 U4.1 U5_1.2 U5_2.2 UART1.1 UART2.1 UART3.1 | length 155.1
  Top Layer w0.254: UART3.1@-7.4,13 -2.298,13 U2.10 -2.602,18.191 -2.909,18.497 -2.997,18.497 -5.1,20.6 C6.1 ; 6.502,7.875 8.464,7.875 9.924,6.415 11.885,6.415 12.1,6.2 12.99,6.2 17.29,10.5 v1(18.3,10.5) ; U5_1.2@6.652,6.885 6.652,6.598 U5_1.2
  Top Layer w0.508: C8_1.1 C8_1.1@2.525,6.475 ; C11_1.1 C10_1.2 C8_1.1@2.525,6.475 ; U5_1.2 6.8,7.577 6.502,7.875 5.45,7.875 4.05,6.475 C8_1.1@2.525,6.475 ; J1.S6@22.6,42.9 23.4,42.9 ; J1.S2@23.6,40.2 23.6,42.7 23.4,42.9 ; J1.S1@28.6,40.2 28.6,42.7 28.4,42.9 ; J1.S3@29.6,42.9 28.4,42.9 ; 23.4,42.9 25.1,42.9 27.1,42.9 28.4,42.9
  Top Layer w0.712: C26.2@21.956,1.281 21.956,1.331 22.825,2.2 C26.2 22.925,2.2 26.225,5.5 30.1,5.5 31.303,4.297 31.303,4.097 P5.1
  Bottom Layer w0.254: UART1.1 6.7,-7.5 8.095,-6.105 8.095,-5.293 10.534,-2.854 18.583,-2.854 19.193,-2.245 19.193,-2.182 v1(19.575,-1.8) 19.45,-1.675 U1.7 ; v1(12,2.4) 12.25,2.15 U1.20 ; C21.2 C21.2@12.825,4.225 ; U1.25 13.25,4.65 C21.2@12.825,4.225 ; U1.35 15.953,8.832 15.953,8.189 16.2,7.942 v1(16.2,6.9) ; C22.2 18.3,10.9 18.45,10.75 U1.40 ; U1.59 24.675,3.15 24.95,3.425 24.95,3.45 v1(25,3.5) ; U1.55 24.975,5.15 25,5.125 v1(25,5.1) ; U5_2.2@25.752,15.615 25.752,15.902 U5_2.2 ; R15.1 31.05,11.5 C2.2 ; C21.2@12.825,4.225 v1(12.8,4.2) 12.825,4.2 12.85,4.225 C21.2@12.825,4.225
  Bottom Layer w0.508: UART2.1 17.012,-7.5 18.112,-6.4 18.112,-6.12 19.182,-5.05 20.35,-5.05 21.725,-3.675 C25.2 ; C8_2.1 21.625,16.025 C10_2.2 C11_2.1 ; C9_2.2 23.15,16.025 24.55,14.625 25.602,14.625 25.9,14.923 U5_2.2 ; P5.1 32.8,9.6 32.962,9.763 32.962,11.337 32.912,11.387 C2.2 33.221,11.696 33.221,11.939 33.644,12.362 33.644,14.406 33.942,14.704 34.839,14.704 U4.1
  Bottom Layer w0.712: C8_2.1@21.625,16.025 C9_2.2 ; C4.1 29.925,19.575 30.25,19.9 C5.1
  other v1: 17,-5.8 14.8,-5.2 -5.7,-0.5 16.2,2 18.7,2 21.2,2 16.2,4.4 18.7,4.4 21.2,4.4 -1.34,5.673 -6,6.1 18.7,6.9 21.2,6.9 27.9,7.1 29.9,7.1 27.9,8.9 29.9,8.9 25.9,14.8 8.8,26 10.6,26 8.8,27.5 10.6,27.5
INT: P1.8 U1.30 | length 44.6
  Top Layer w0.254: v1(10.8,8.1) 10.8,7.472 11.403,6.869 12.769,6.869 16.892,10.992 17.758,10.992 18.966,12.2 19.6,12.2 24,16.6 24,21.3 27.25,24.55 P1.8
  Bottom Layer w0.254: v1(10.8,8.1) 10.8,7.455 11.386,6.869 12.27,6.869 12.551,7.15 U1.30
MCLR: C25.1 P4.1 R11.1 U1.9 | length 14.8
  Top Layer w0.254: v1(16.2,-1.8) 16.285,-1.885 16.505,-1.885 P4.1
  Bottom Layer w0.254: v1(16.2,-1.8) 17.2,-0.8 18.207,-0.8 18.447,-0.56 18.447,-0.038 U1.9 ; P4.1 21.693,-5.727 21.693,-5.397 22.94,-4.15 22.94,-2.986 22.852,-2.898 22.852,-2.723 C25.1
NetC3_1: C3.1 R9.1 R14.2 R15.2 | length 4.9
  Bottom Layer w0.254: C3.1 R9.1@29.55,14.525 ; R15.2 R14.2 ; R14.2@29.6,12.95 R14.2 ; R9.1 29.55,14.55 R9.1@29.55,14.525 ; R14.2 R9.1@29.55,14.525
NetC12_1: C12.1 L1.1 U4.2 | length 7.9
  Bottom Layer w0.712: C12.1 35,16 ; U4.2 36.183,13.8 36.6,14.217 36.6,15.583 36.183,16 35,16 ; L1.1 35.075,16.075 35,16
NetC12_2: C12.2 U4.6 | length 1.5
  Bottom Layer w0.254: U4.6 32.515,15.44 33.025,15.95 C12.2
NetD2_1: D2.1 R10.2 | length 2
  Top Layer w0.254: D2.1 6.523,0.027 6.523,-1.331 R10.2
NetR1_1: R1.1 UART2.3 | length 1.6
  Bottom Layer w0.254: UART2.3 11.6,-6.05 R1.1
NetR2_1: R2.1 UART2.2 | length 5.9
  Bottom Layer w0.254: R2.1 10.15,-5.95 10.448,-6.248 10.448,-7.806 11.173,-8.531 12.569,-8.531 UART2.2
NetR3_1: R3.1 UART3.3 | length 1.5
  Bottom Layer w0.254: UART3.3@-7.2,16.8 -7.2,16.783 -6.917,16.5 -5.95,16.5 R3.1
NetR4_1: R4.1 UART3.2 | length 1.7
  Bottom Layer w0.254: UART3.2@-7.4,15 -7.348,14.948 -6.148,14.948 -5.85,14.65 R4.1
NetR5_1: R5.1 U4.5 | length 15.4
  Top Layer w0.254: v1(31.1,14.5) 31.1,10.75 37.752,4.098 37.752,4.048 38.05,3.75 R5.1
  Bottom Layer w0.254: v1(31.1,14.5) 31.627,13.973 32.342,13.973 U4.5
NetR12_1: R12.1 UART1.3 | length 1.5
  Bottom Layer w0.254: R12.1@-7.4,-6.25 R12.1 ; UART1.3 R12.1 ; R12.1@-7.25,-6.15 R12.1
NetR13_1: R13.1 UART1.2 | length 1.4
  Bottom Layer w0.254: UART1.2 R13.1 R13.1@-5.269,-6.181
NetR14_1: R14.1 U4.4 | length 1.7
  Bottom Layer w0.254: R14.1 30.9,12.85 U4.4
NetR16_1_1: R16_1.1 U5_1.3 | length 1.5
  Top Layer w0.254: R16_1.1 7.45,5.15 7.75,5.45 U5_1.3
NetR16_2_1: R16_2.1 U5_2.3 | length 1.5
  Bottom Layer w0.254: R16_2.1 26.55,17.35 26.85,17.05 U5_2.3
PGC: P4.5 U1.15 | length 27.3
  Top Layer w0.254: v1(12,-1) 12.121,-1 12.252,-0.869 16.669,-0.869 20.7,-4.9 29.68,-4.9 P4.5
  Bottom Layer w0.254: v1(12,-1) 12.2,-1 13.6,-2.4 14.4,-2.4 15.45,-1.35 U1.15@15.45,-0.035
PGD: P4.4 U1.16 | length 19.7
  Top Layer w0.254: v1(14.1,-1.6) 14.1,-1.619 20.381,-7.9 27.14,-7.9 P4.4
  Bottom Layer w0.254: v1(14.1,-1.6) 14.185,-1.515 14.185,-1.315 14.947,-0.553 14.947,-0.038 U1.16
RX1: R12.2 U1.18 | length 24
  Bottom Layer w0.254: R12.2@-7.25,-4.85 -6.576,-4.176 -6.3,-3.9 6.6,-3.9 10.748,0.248 12.746,0.248 13.651,1.153 14.262,1.153 U1.18
RX2: R1.2 U1.5 | length 12.7
  Bottom Layer w0.254: R1.2 14.316,-4.65 14.497,-4.469 18.961,-4.469 20.806,-2.623 20.806,-0.977 20.453,-0.623 20.453,-0.038 U1.5
RX3: R3.2 U1.29 | length 23.9
  Bottom Layer w0.254: R3.2 -4.55,16.35 -4.252,16.052 -4.24,16.052 -3.154,14.966 -3.154,13.612 4.043,6.415 12.458,6.415 12.693,6.65 U1.29
SCL: P1.3 U1.42 | length 32.8
  Top Layer w0.254: v1(20.1,10.354) 25.3,15.554 25.3,20.2 26.3,21.2 30.65,21.2 P1.3
  Bottom Layer w0.254: U1.42 19.453,8.838 19.453,9.707 v1(20.1,10.354)
SDA: P1.4 U1.41 | length 33.3
  Top Layer w0.254: v1(19.9,11.4) 24.6,16.1 24.6,20.8 25.7,21.9 32.49,21.9 P1.4
  Bottom Layer w0.254: U1.41 18.95,10.05 19.369,10.469 19.369,10.869 v1(19.9,11.4)
TX1: R13.2 U1.17 | length 21.8
  Bottom Layer w0.254: R13.2 6.65,-4.85 11.294,-0.206 12.934,-0.206 13.787,0.647 14.262,0.647 U1.17
TX2: R2.2 U1.6 | length 13.8
  Bottom Layer w0.254: R2.2 10.15,-4.65 11.406,-3.394 19.394,-3.394 20.352,-2.435 20.352,-1.165 20.16,-0.973 20.099,-0.973 19.95,-0.824 U1.6
TX3: R4.2 U1.21 | length 25.1
  Bottom Layer w0.254: R4.2 -4.55,12.35 4.352,3.448 12.339,3.448 13.137,2.65 U1.21
USB_D+: J1.3 U1.37 | length 45.5
  Top Layer w0.254: v1(12,8.6) 12.075,8.675 12.075,9.675 14.8,12.4 16.8,12.4 18.6,14.2 18.8,14.2 21.9,17.3 21.9,34 26.4,38.5 J1.3
  Bottom Layer w0.254: v1(12,8.6) 12,8.976 13.109,10.085 14.091,10.085 16.365,10.085 16.947,9.502 16.947,8.838 U1.37
USB_D-: J1.2 U1.36 | length 46.5
  Top Layer w0.254: v1(11.967,7.6) 12.034,7.6 12.869,8.435 12.869,9.369 15.4,11.9 17,11.9 18.7,13.6 19.2,13.6 22.6,17 22.6,33.7 27.05,38.15 J1.2
  Bottom Layer w0.254: v1(11.967,7.6) 12.034,7.6 12.731,8.297 12.731,9.065 13.297,9.631 13.903,9.631 16.176,9.631 16.447,9.36 16.447,8.838 U1.36
USB_ID: J1.4 U1.38 | length 47.5
  Top Layer w0.254: v1(10.5,9.1) 14.254,12.854 16.554,12.854 21.2,17.5 21.2,34.2 25.75,38.75 J1.4
  Bottom Layer w0.254: v1(10.5,9.1) 11.466,9.1 12.905,10.539 16.553,10.539 17.447,9.645 17.447,8.838 U1.38
VBAT: C1.2 C2.1 C26.1 P5.2 R5.2 U4.3 | length 23.3
  Top Layer w0.254: P5.2 37.95,2.6 R5.2
  Top Layer w0.712: C26.1 28.975,2.2 31.275,-0.1 33.9,-0.1 34.8,0.8 P5.2
  Bottom Layer w0.712: C2.1 34.469,11.406 C2.1@34.469,11.273 ; P5.2 34.8,5.3 34.5,5.6 C1.2 34.5,11.137 34.469,11.168 C2.1@34.469,11.273 ; U4.3 34.622,12.85 34.566,12.794 34.566,11.37 C2.1@34.469,11.273
VBUS: J1.1 U1.33 | length 39.6
  Top Layer w0.254: v1(13.6,8.9) 16.146,11.446 17.346,11.446 18.8,12.9 19.4,12.9 23.3,16.8 23.3,33.4 27.7,37.8 J1.1
  Bottom Layer w0.254: v1(13.6,8.9) 14.947,8.9 14.95,8.897 U1.33
XBEE_DIN: R6.1 U2.3 | length 30.6
  Bottom Layer w0.254: U2.3 -1.1,31.039 -1.1,13.9 1.1,11.7 4.166,11.7 4.766,12.3 7.921,12.3 8.221,12 R6.1
  other v1: 7.8,12.3
XBEE_DIN_R: R6.2 U1.45 | length 15.1
  Bottom Layer w0.254: R6.2 15.8,12 17.406,13.606 19.394,13.606 21.285,11.715 21.285,9.863 20.953,9.531 20.953,8.838 U1.45
XBEE_DOUT: R7.1 U2.2 | length 35.3
  Bottom Layer w0.254: U2.2 -3.844,32.698 -3.844,17.256 -2.7,16.112 -2.7,13.8 0.2,10.9 4.4,10.9 4.8,11.3 v1(7.1,11.3) 8,10.4 R7.1
XBEE_DOUT_R: R7.2 U1.44 | length 14.7
  Bottom Layer w0.254: R7.2 12.082,10.4 12.882,11.2 15.813,11.2 17.2,12.587 17.665,13.052 19.282,13.052 20.831,11.503 20.831,10.051 20.453,9.673 20.453,8.838 U1.44
pads on no net: P1.5 P1.6 P1.7 P1.9 P1.10 P4.6 U1.1 U1.2 U1.3 U1.4 U1.10 U1.11 U1.12 U1.13 U1.14 U1.22 U1.23 U1.24 U1.27 U1.28 U1.31 U1.32 U1.43 U1.46 U1.47 U1.48 U1.49 U1.50 U1.51 U1.52 U1.53 U1.56 U1.57 U1.58 U1.61 U1.62 U1.63 U1.64 U1.65 U2.4 U2.5 U2.6 U2.7 U2.8 U2.9 U2.11 U2.12 U2.13 U2.14 U2.15 U2.16 U2.17 U2.18 U2.19 U2.20 U5_1.4 U5_2.4
copper on no net:
  other v1: 5.9,10.5

## Polygon pours and split planes (outlines as drawn)
VBAT on Bottom Layer "NONET_L02_P-001" (solid, pour order 1): 33.9,13.2 33.9,1.5 35.6,1.5 37.5,3.4 37.5,11.3 35.6,13.2
GND on Bottom Layer "NONET_L02_P-001" (solid, pour order 2): 22.4,30.8 22.4,45 45,45 45,-10 -10,-10 -10,30.8
GND on Top Layer "NONET_L02_P-001" (solid, pour order 0): 22.4,30.8 22.4,45 45,45 45,-10 -10,-10 -10,30.8

## Silkscreen, mask and mechanical layers (free items; w line width, h text height)
Top Overlay:
  circle w1.15: c0,0 r3.2
  circle w1.15: c0,42 r2.175
  circle w1.15: c37,37 r2.175
  circle w1.15: c42,0 r2.175
  circle w0.712: c21.1,-3.6 r0.3
  circle w0.4: c14.6,-2.4 r0.17
  circle w0.3: c14.6,-2.4 r1.6
  lines w0.3: -8.19,8.7 -4.89,8.7 ; -5.2,-3.85 -5.2,-0.55 ; -6.638,-2.248 cw(c-5.15,-4.9) -3.713,-2.221 cw(c-5.2,0.35) -6.638,-2.248 ; -6.589,10.138 ccw(c-3.99,8.7) -6.561,7.213 ccw(c-9.24,8.65) -6.589,10.138
  text "5V" at 5.854,1.554 h1.52
  text "+" at 34.454,-2.2 h1.52
  text "-" at 32.154,-2.408 h1.52
  text "3V3" at 23.153,-2.453 h0.8 r270
  text "GND" at 25.653,-2.453 h0.8 r270
Bottom Overlay:
  circle w1.15: c0,0 r3.2
  circle w1.15: c42,0 r2.175
  circle w1.15: c37,37 r2.175
  circle w1.15: c0,42 r2.175
Board:
  the board outline again, w0.2